# Altium PCB UWB_Tag_V1.PcbDoc
Units mm, origin at the board's own origin, x right, y up, seen from the top; angles counter-clockwise.
Board outline 88.65 x 72.77 mm, 2 copper layers (Top Layer, Bottom Layer); 71 components, 54 nets, 304 pads, 117 vias.
Unrouted connection lines stored in the file: 1.
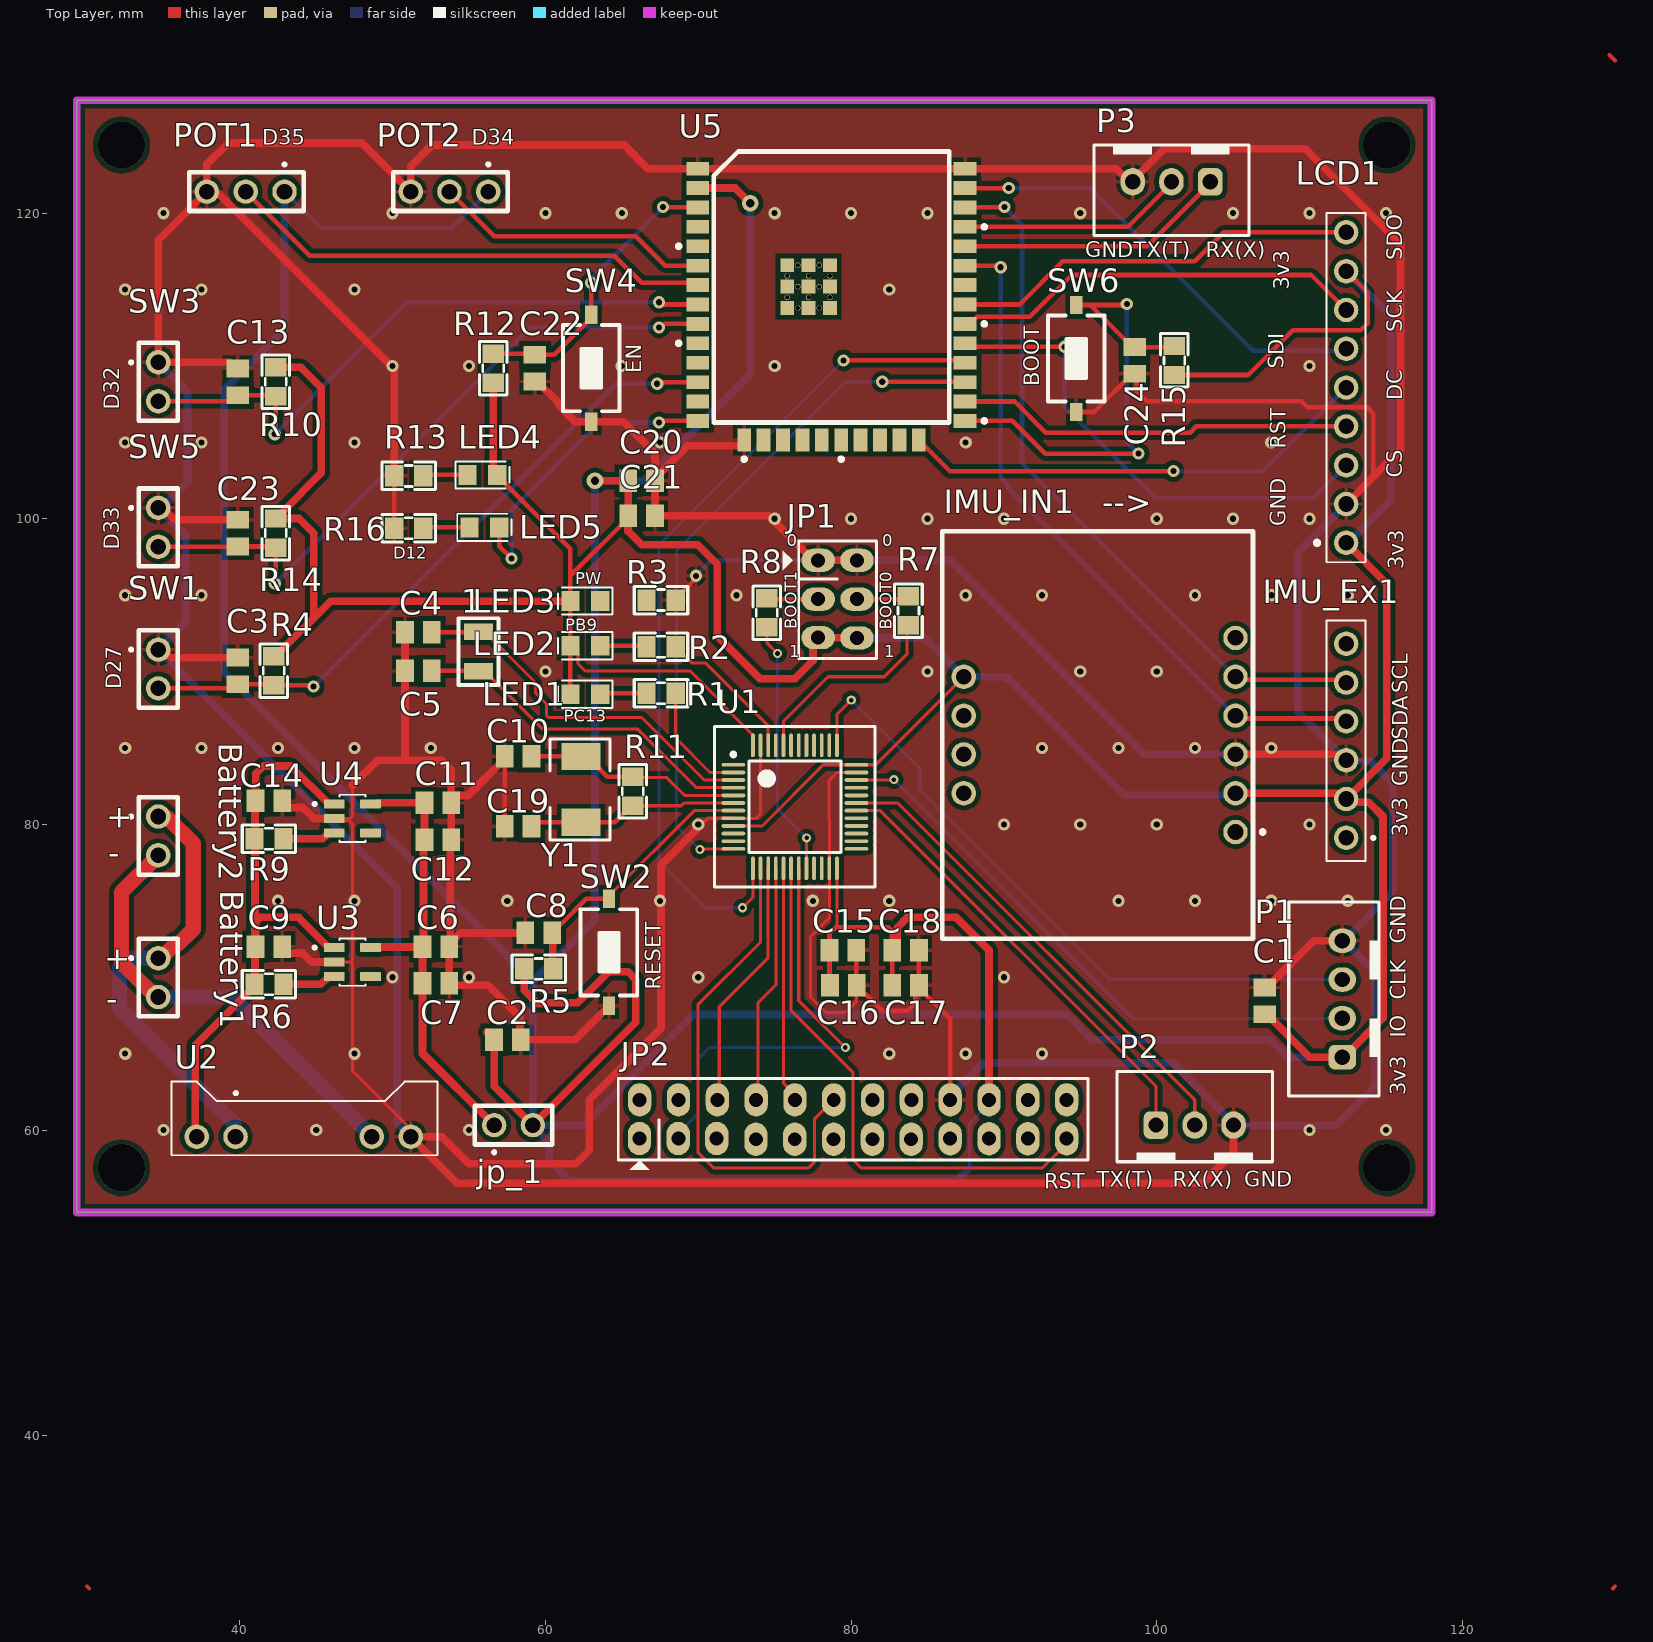
[diagram p0: Top Layer view]
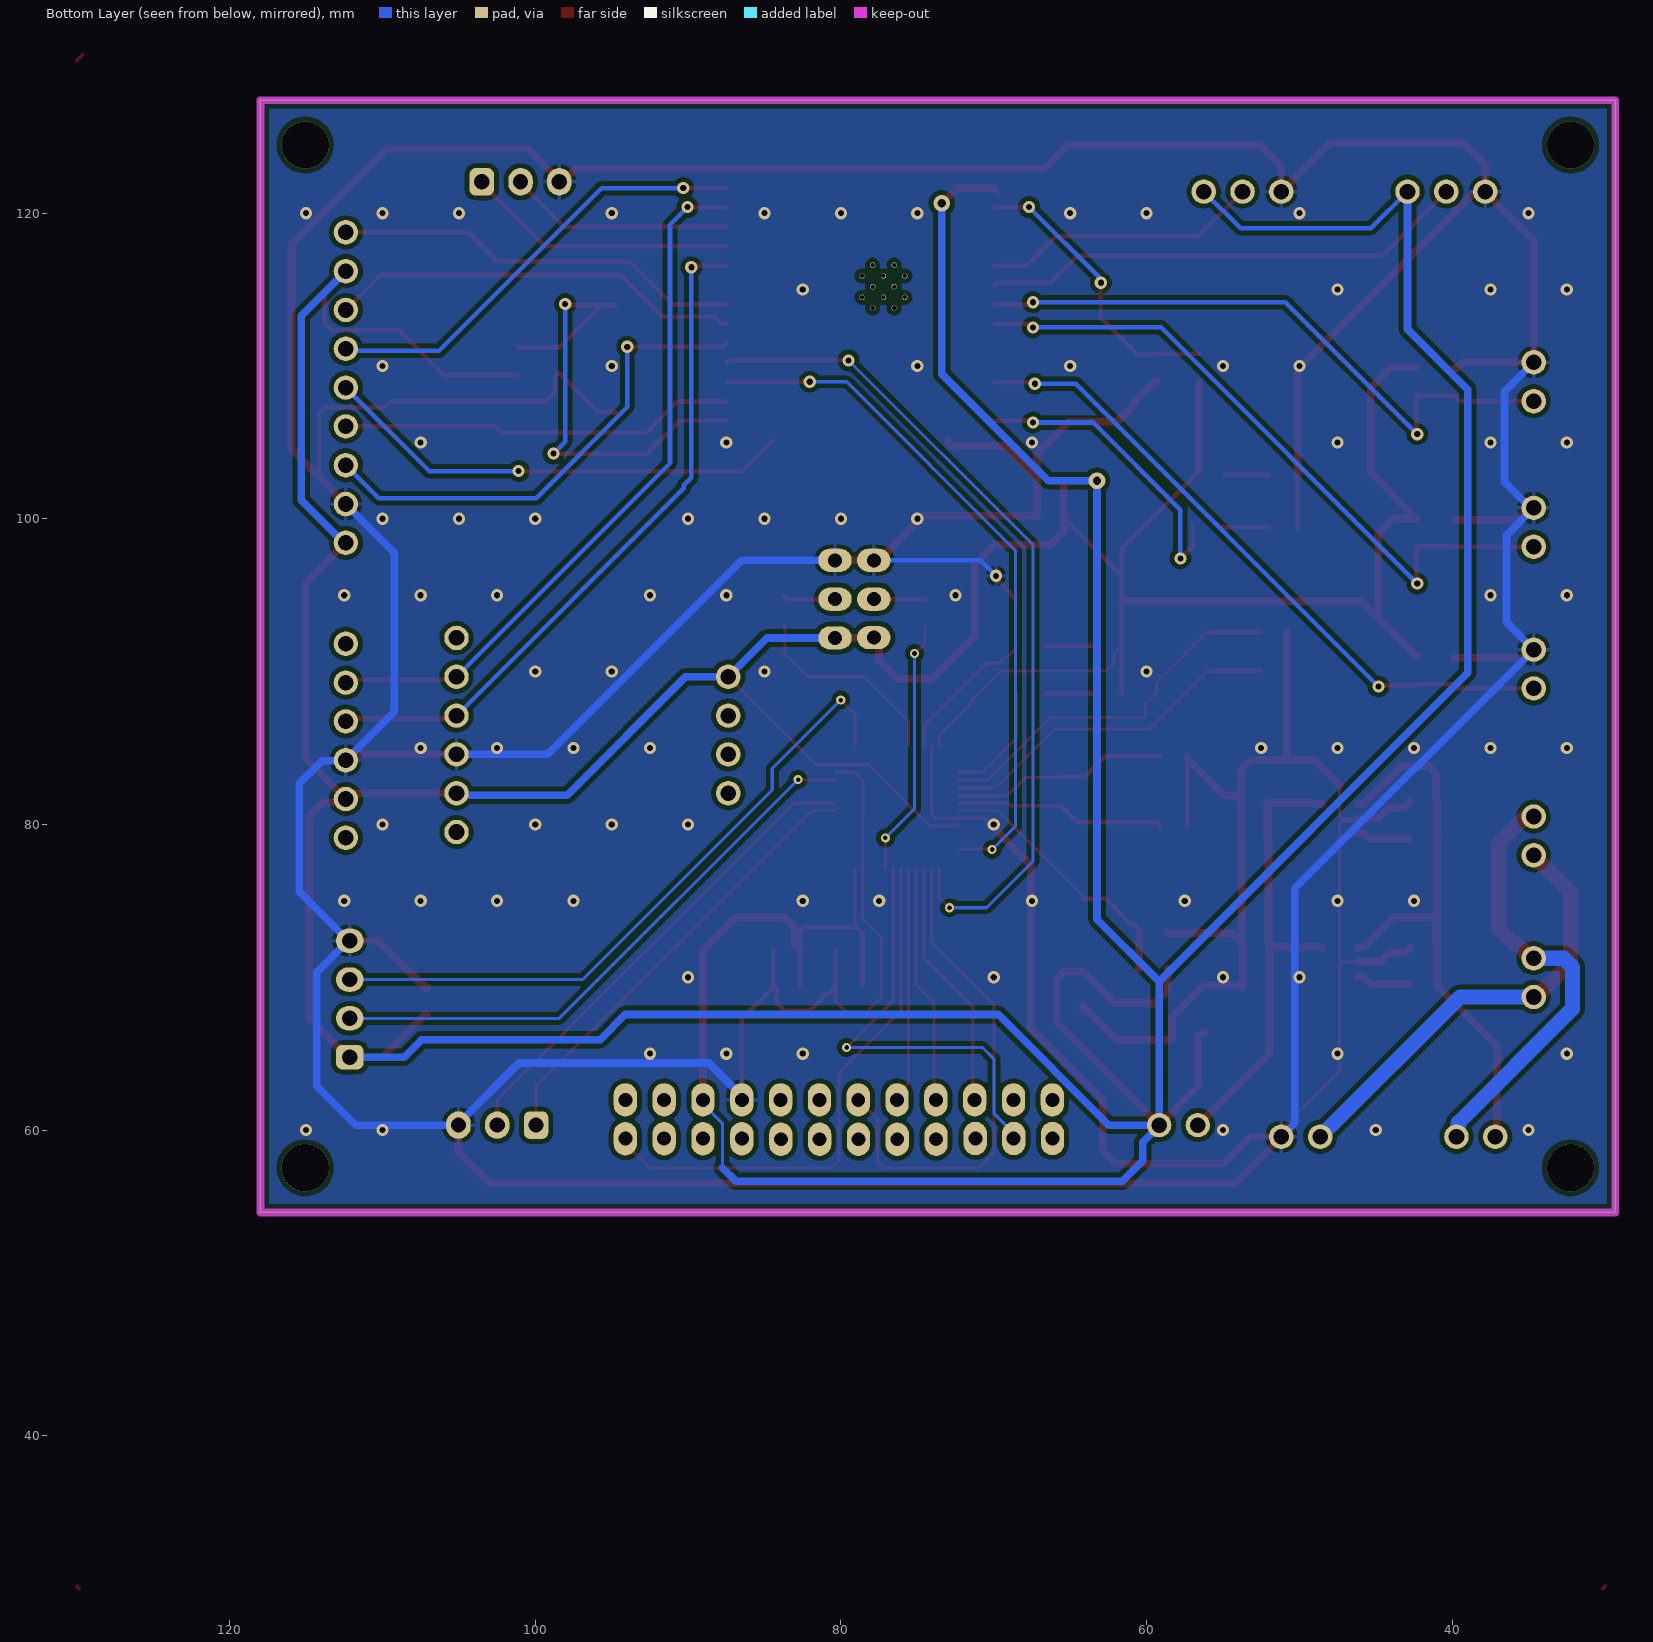
[diagram p1: Bottom Layer view, seen from below]

## Layer stack, top to bottom
Top Solder: solder mask 0.0102, Solder Resist, Dk 3.5
Top Layer: signal copper 0.0356
Dielectric 1: dielectric 0.32, FR-4, Dk 4.8
Bottom Layer: signal copper 0.0356
Bottom Solder: solder mask 0.0102, Solder Resist, Dk 3.5

## Board outline
29.337,54.61 29.337,127.381 117.983,127.381 117.983,54.61

## Design rules (kind name [scope] priority, off if disabled: settings)
Clearance [All] p1: gap=0.2 ignorepadtopadclearanceinfootprint=FALSE
PolygonConnect [All] p1: connectstyle=Relief reliefconductorwidth=0.254 reliefentries=4 polygonreliefangle="90 Angle" airgapwidth=0.254
RoutingVias [All] p1: holewidth=0.711 width=1.27 viastyle="Through Hole" minholewidth=0.711 minwidth=1.27 maxholewidth=0.711 maxwidth=1.27
SolderMaskExpansion [All] p1: expansion=0.102 istentingtop=FALSE
Width RON [InNetClass('RON')] p1: maxlimit=0.5 minlimit=0.2 preferedwidth=0.3
Width POW [InNetClass('POW')] p2: maxlimit=1 minlimit=0.3 preferedwidth=0.5
30 further rules are at their usual default settings.

## Classes and differential pairs
net class RON: 3V3 BOOT BOOT0 BOOT1 D2/SPI_DC D4/SPI_RST D5/SPI_CS D12/LED1 D18/SPI_SCK D19/SPI_SDO D23/SPI_SDI D27 D32 D33 D34_Pot1 D35_Pot2 DB_RX DB_TX DW_IRQ DW_NSS DW_RESET EN GND MISO MOSI NetJP1_2 NetJP1_5 NetLED1_2 NetLED2_2 NetLED3_2 NetLED4_2 NetLED5_2 NetR6_2 NetR9_2 O_3V3 OSCIN OSCOUT PB9 PC13 PC14 PC15 RESET RX0 SCK SCL SDA STMRX_ESPTX STMTX-ESPRX SWCLK SWIO TX0 VOUT
net class POW: VBAT+ VBAT-

## Components (designator, comment, footprint, x,y, rotation, side; value= is the part's Value field where it differs from the comment)
1 "ABS07" ABS07 55.626,91.313 r90 top
Battery1 "JP_1x2" JP_1x2 34.671,69.977 r270 top
Battery2 "JP_1x2" JP_1x2 34.671,79.248 r270 top
C1 "10uF" Capacitor_0805 107.061,68.453 r270 top
C2 "0.1uF" Capacitor_0805 57.517,65.913 r0 top
C3 "10uF" Capacitor_0805 39.878,90.043 r90 top
C4 "20pF" Capacitor_0805 51.689,92.583 r0 top
C5 "20pF" Capacitor_0805 51.689,90.043 r0 top
C6 "47uF" Capacitor_0805 52.832,72.009 r0 top
C7 "0.1uF" Capacitor_0805 52.832,69.596 r0 top
C8 "0.1uF" Capacitor_0805 59.563,72.898 r180 top
C9 "0.1uF" Capacitor_0805 41.91,72.009 r0 top
C10 "20pF" Capacitor_0805 58.215,84.455 r0 top
C11 "47uF" Capacitor_0805 52.959,81.407 r0 top
C12 "0.1uF" Capacitor_0805 52.959,78.994 r0 top
C13 "10uF" Capacitor_0805 39.878,108.966 r90 top
C14 "0.1uF" Capacitor_0805 41.91,81.534 r0 top
C15 "0.1uF" Capacitor_0805 79.465,71.755 r0 top
C16 "0.1uF" Capacitor_0805 79.502,69.469 r0 top
C17 "0.1uF" Capacitor_0805 83.566,69.469 r0 top
C18 "0.1uF" Capacitor_0805 83.566,71.755 r0 top
C19 "20pF" Capacitor_0805 58.215,79.883 r0 top
C20 "10uF" Capacitor_0805 66.294,102.489 r0 top
C21 "0.1uF" Capacitor_0805 66.294,100.203 r0 top
C22 "10uF" Capacitor_0805 59.309,109.855 r270 top
C23 "10uF" Capacitor_0805 39.878,99.06 r90 top
C24 "10uF" Capacitor_0805 98.552,110.363 r270 top
IMU_Ex1 "BNO055" BNO055_External 112.395,85.471 r90 top
IMU_IN1 "BNO055" BNO055_Internal 96.266,85.852 r90 top
JP1 "Connector 3x2" JP3x2 79.121,94.742 r270 top
JP2 "Connector 12x2" JP12X2_1 66.167,59.436 r0 top
jp_1 "SW_POWER" JP_1x2 57.912,60.325 r0 top
LCD1 "ILI9341" ILI9341_LCD3.5 112.395,108.585 r0 top
LED1 "Led" "Led 0805 Blue" 62.611,88.519 r0 top
LED2 "Led" "Led 0805 Blue" 62.611,91.694 r0 top
LED3 "Led" "Led 0805 Blue" 62.611,94.615 r0 top
LED4 "Led" "Led 0805 Blue" 55.88,102.87 r180 top
LED5 "Led" "Led 0805 Blue" 56.007,99.441 r180 top
P1 "SWD" HDR/Header/4/BOX 112.141,68.58 r90 top
P2 "UART" HDR/Header/3/BOX 102.489,60.325 r90 top
P3 "UART" HDR/Header/3/BOX 100.965,122.047 r270 top
POT1 "JP_1x3" JP_1x3 44.323,115.951 r180 top
POT2 "JP_1x3" JP_1x3 57.658,115.951 r180 top
R1 "1k" "tro smd 0805" 67.564,88.646 r0 top
R2 "1k" "tro smd 0805" 67.564,91.694 r0 top
R3 "1k" "tro smd 0805" 67.564,94.742 r0 top
R4 "10k" "tro smd 0805" 42.164,90.043 r90 top
R5 "10k" "tro smd 0805" 59.563,70.485 r180 top
R6 "1k" "tro smd 0805" 41.91,69.596 r0 top
R7 "10k" "tro smd 0805" 83.693,93.98 r90 top
R8 "10k" "tro smd 0805" 74.549,93.853 r270 top
R9 "1k" "tro smd 0805" 41.91,79.121 r0 top
R10 "10k" "tro smd 0805" 42.291,108.966 r90 top
R11 "1M" "tro smd 0805" 65.659,82.169 r90 top
R12 "10k" "tro smd 0805" 56.642,109.855 r270 top
R13 "1k" "tro smd 0805" 51.054,102.743 r180 top
R14 "10k" "tro smd 0805" 42.291,99.06 r90 top
R15 "10k" "tro smd 0805" 101.219,110.363 r270 top
R16 "1k" "tro smd 0805" 51.054,99.314 r180 top
SW1 "JP_1x2" JP_1x2 34.671,90.17 r270 top
SW2 "SW" SW1-SMD 64.156,71.628 r90 top value="SW chip 2 pin"
SW3 "JP_1x2" JP_1x2 34.671,108.966 r270 top
SW4 "SW" SW1-SMD 62.992,109.855 r90 top value="SW chip 2 pin"
SW5 "JP_1x2" JP_1x2 34.671,99.441 r270 top
SW6 "SW" SW1-SMD 94.742,110.49 r90 top value="SW chip 2 pin"
U1 "STM32F103C8T6" LQFP48 76.327,81.153 r270 top
U2 "TP4056_charger" TP4056_charger 44.181,48.063 r90 top
U3 "AP2112K-3.3TRG1" SOT95P285X140-5N 47.371,70.993 r0 top
U4 "AP2112K-3.3TRG1" SOT95P285X140-5N 47.371,80.391 r0 top
U5 "ESP32_WROOM_32U" ESP32_WROOM_32U 78.719,114.032 r0 top
Y1 "8Mhz" "Thach Anh 2 chan SMD5032" 62.335,82.296 r90 top value=4Mhz

## Footprints (in the part's own frame and the unit in brackets; to place one, negate y for a bottom-side part, rotate by r counter-clockwise, add the part's x,y. Pads: shape width x height; smd on the part's side, far side on the other; paste and mask are expansions set on the pad)
ABS07 [mm] "HC-49US XTAL"
  rect 1.1x1.9 smd: 1(-1.29,0) 2(1.29,0)
  silkscreen extent -2.19,-1.3 2.18,1.31, body extent -1.6,-0.75 1.6,0.75, height 0.9
BNO055_External [mm]
  round 1.6 hole 1.02 mask+0.1: 1(-6.35,0) 2(-3.81,0) 3(-1.27,0) 4(1.27,0) 5(3.81,0) 6(6.35,0)
  silkscreen extent -7.87,-1.88 7.87,1.27, body extent -8.75,-2.16 8.75,3.59, height 7.1
BNO055_Internal [mm]
  round 1.6 hole 1.02 mask+0.1: 1(-6.35,-8.89) 2(-3.81,-8.89) 3(-1.27,-8.89) 4(1.27,-8.89) 5(3.81,-8.89) 6(6.35,-8.89) 7(3.81,8.89) 8(1.27,8.89) 9(-1.27,8.89) 10(-3.81,8.89)
  silkscreen extent -13.33,-10.77 13.33,10.29, body extent -13.33,-10.12 13.33,10.29, height 9.15
Capacitor_0805 [mm]
  rect 1.16x1.47 smd: 1(-0.875,0) 2(0.875,0)
  body extent -1,-0.6 1,0.6, height 1.2
ESP32_WROOM_32U [mm]
  rect 1.5x0.9 smd: 1(-8.75,8.88) 2(-8.75,7.61) 3(-8.75,6.34) 4(-8.75,5.07) 5(-8.75,3.8) 6(-8.75,2.53) 7(-8.75,1.26) 8(-8.75,-0.01) 9(-8.75,-1.28) 10(-8.75,-2.55) 11(-8.75,-3.82) 12(-8.75,-5.09) 13(-8.75,-6.36) 14(-8.75,-7.63) 25(8.75,-7.63) 26(8.75,-6.36) 27(8.75,-5.09) 28(8.75,-3.82) 29(8.75,-2.55) 30(8.75,-1.28) 31(8.75,-0.01) 32(8.75,1.26) 33(8.75,2.53) 34(8.75,3.8) 35(8.75,5.07) 36(8.75,6.34) 37(8.75,7.61) 38(8.75,8.88)
  rect 0.9x1.5 smd: 15(-5.715,-8.88) 16(-4.445,-8.88) 17(-3.175,-8.88) 18(-1.905,-8.88) 19(-0.635,-8.88) 20(0.635,-8.88) 21(1.905,-8.88) 22(3.175,-8.88) 23(4.445,-8.88) 24(5.715,-8.88)
  rect 0.9x0.9 smd: 39_1(-2.9,2.56) 39_2(-1.5,2.56) 39_3(-0.1,2.56) 39_4(-2.9,1.16) 39_5(-1.5,1.16) 39_6(-0.1,1.16) 39_7(-2.9,-0.24) 39_8(-1.5,-0.24) 39_9(-0.1,-0.24)
  round 0.35 hole 0.3 mask+0: 40_1(-2.2,2.56) 40_2(-0.8,2.56) 40_3(-2.9,1.86) 40_4(-1.5,1.86) 40_5(-0.1,1.86) 40_6(-2.2,1.16) 40_7(-0.8,1.16) 40_8(-2.9,0.46) 40_9(-1.5,0.46) 40_10(-0.1,0.46) 40_11(-2.2,-0.24) 40_12(-0.8,-0.24)
  silkscreen extent -10.1,-10.23 10.1,10, body extent -9,-9.13 9,10.07, height 3.35
HDR/Header/3/BOX [mm]
  rrect50% 1.8x1.6 hole 1: 1(0,2.54)
  oval 1.8x1.6 hole 1: 2(0,0) 3(0,-2.54)
  silkscreen extent -2.41,-5.08 3.5,5.08, body extent -2.29,-5 3.41,5, height 7
HDR/Header/4/BOX [mm]
  rrect50% 1.6x1.8 hole 1: 1(-3.81,0)
  oval 1.6x1.8 hole 1: 2(-1.27,0) 3(1.27,0) 4(3.81,0)
  silkscreen extent -6.35,-2.41 6.35,3.5, body extent -6.25,-2.3 6.25,3.4, height 7
ILI9341_LCD3.5 [mm]
  round 1.6 hole 1.02 mask+0.1: 1(0,-10.16) 2(0,-7.62) 3(0,-5.08) 4(0,-2.54) 5(0,0) 6(0,2.54) 7(0,5.08) 8(0,7.62) 9(0,10.16)
  silkscreen extent -2.03,-11.43 1.27,11.43, body extent -3.56,-12.5 2.19,12.5, height 7.1
JP3x2 [mil] "Connector 3x2"
  oval 60x86 hole 36: 1(-100,-50) 2(0,-50) 3(99,-50) 4(-100,50) 5(0,50) 6(100,50)
  silkscreen extent -150,-141 153,100, body extent -150,-100 150,100, height 335
JP12X2_1 [mil]
  oval 60x86 hole 36: 1(-0.5,0.5) 2(99.5,0.5) 3(198.5,0.5) 4(299.5,-1.5) 5(399.5,-1.5) 6(499.5,-1.5) 7(599.5,-1.5) 8(699.5,-1.5) 9(800,0) 10(900,0) 11(1000,0) 12(1100,0) 13(0,100) 14(100,100) 15(200,100) 16(300,100) 17(400,100) 18(500,100) 19(600,100) 20(700,100) 21(800,100) 22(900,100) 23(1000,100) 24(1100,100)
  silkscreen extent -55,-80 1155,155, body extent -55,-47 1155,150, height 366
JP_1x2 [mm] "CWF2 (DS1069-1x2)"
  round 1.6 hole 1.02 mask+0.1: 1(-1.27,0) 2(1.27,0)
  silkscreen extent -2.54,-1.88 2.54,1.27, body extent -3.77,-2.2 3.73,3.55, height 7
JP_1x3 [mm] "CWF3 (DS1069-1x3)"
  round 1.6 hole 1.02 mask+0.1: 1(1.397,-5.461) 2(3.937,-5.461) 3(6.477,-5.461)
  silkscreen extent 0.13,-7.34 7.62,-4.19, body extent -1.06,-7.66 8.94,-1.9, height 7.1
"Led 0805 Blue" [mm]
  rect 1.2x1.3 smd: 1(-0.975,0) 2(0.975,0)
  silkscreen extent -1.78,-0.89 1.78,0.89, body extent -1.01,-0.62 1.01,0.63, height 1.1
LQFP48 [mm]
  oval 0.25x1.55 smd: 1(-2.75,-4.025) 2(-2.25,-4.025) 3(-1.75,-4.025) 4(-1.25,-4.025) 5(-0.75,-4.025) 6(-0.25,-4.025) 7(0.25,-4.025) 8(0.75,-4.025) 9(1.25,-4.025) 10(1.75,-4.025) 11(2.25,-4.025) 12(2.75,-4.025) 25(2.75,4.025) 26(2.25,4.025) 27(1.75,4.025) 28(1.25,4.025) 29(0.75,4.025) 30(0.25,4.025) 31(-0.25,4.025) 32(-0.75,4.025) 33(-1.25,4.025) 34(-1.75,4.025) 35(-2.25,4.025) 36(-2.75,4.025)
  oval 1.55x0.25 smd: 13(4.025,-2.75) 14(4.025,-2.25) 15(4.025,-1.75) 16(4.025,-1.25) 17(4.025,-0.75) 18(4.025,-0.25) 19(4.025,0.25) 20(4.025,0.75) 21(4.025,1.25) 22(4.025,1.75) 23(4.025,2.25) 24(4.025,2.75) 37(-4.025,2.75) 38(-4.025,2.25) 39(-4.025,1.75) 40(-4.025,1.25) 41(-4.025,0.75) 42(-4.025,0.25) 43(-4.025,-0.25) 44(-4.025,-0.75) 45(-4.025,-1.25) 46(-4.025,-1.75) 47(-4.025,-2.25) 48(-4.025,-2.75)
  silkscreen extent -5.25,-5.25 5.25,5.25, body extent -4.5,-4.5 4.5,4.5, height 1.5
SOT95P285X140-5N [mm]
  rrect15% 1.35x0.6 smd: 1(-1.185,0.95) 2(-1.185,0) 3(-1.185,-0.95) 4(1.185,-0.95) 5(1.185,0.95)
  silkscreen extent -2.57,-1.55 0.85,1.55, body extent -1.5,-1.4 1.5,1.4, height 1.4
SW1-SMD [mm]
  rect 1.2x0.8 smd: 1(-3.5,0) 2(3.5,0)
  silkscreen extent -2.82,-1.85 2.82,1.85, body extent -3.05,-1.85 3.05,1.85, height 2.5
"Thach Anh 2 chan SMD5032" [mil]
  rect 70x100 smd: 1(-85,0) 2(85,0)
  silkscreen extent -130,-75 130,80, body extent -98,-63 98,63, height 51
TP4056_charger [mm]
  round 1.6 hole 1.02 mask+0.1: 1(11.5,4.46) 2(11.5,-4.46) 3(11.5,7) 4(11.5,-7)
  silkscreen extent 10.29,-8.76 15.11,8.64, body extent -14.19,-8.76 15.11,8.64, height 9.34
"tro smd 0805" [mm]
  rect 1.2x1.4 smd: 1(-0.946,-0.061) 2(0.954,-0.061)
  silkscreen extent -1.75,-0.97 1.75,0.84, body extent -1.56,-0.76 1.44,0.64, height 0.53

## Part data
1: "SMD Quartz Crystal", Created by="Zion Blue", Published="28 April 2014", Publisher="Cynetik Group"
C1 C2 C3 C4 C5 C6 C7 C8 C9 C10 C11 C12 C13 C14 C15 C16 C17 C18 C19 C20 C21 C22 C23 C24: library part Capacitor_0805, "Capacitor; Ceramic; Cap; .220uF; Tol 10%; SMT; Vol-Rtg 50V; X7R; Tape And Reel"
IMU_Ex1: library part BNO055_External
JP1: library part JP3x2
JP2: library part JP12x2
jp_1: library part JP_1x2
LCD1: library part ILI9341_LCD3.5
LED1 LED2 LED3 LED4 LED5: "Typical LED"
P1: library part "Header 4_1", "Header, 4-Pin"
P2 P3: library part "Header 3", "Header, 3-Pin"
R1 R2 R3 R6 R9 R13 R16: library part "Tro 0805 1% 1k", "Dán", Chung_Loai=Dán, Don_Vi=Con, Ma_Hang=MH005468, So_Chan=2, Ten_Linh_Kien="Trở 0805 1% 1k"
R4 R5 R7 R8 R10 R12 R14 R15: library part "Tro 0805 1% 10k", "Dán", Chung_Loai=Dán, Don_Vi=Con, Ma_Hang=MH005473, So_Chan=2, Ten_Linh_Kien="Trở 0805 1% 10k"
R11: library part "Tro 0805 1% 1M", "Dán", Chung_Loai=Dán, Don_Vi=Con, Ma_Hang=MH005469, So_Chan=2, Ten_Linh_Kien="Trở 0805 1% 1M"
SW2 SW4 SW6: library part SW2, "Switch button 2 pin"
U1: "STM32 ARM-based 32-bit MCU with ARM 32-bit Cortex-M3 Microcontroller, 128 Kbytes Flash, 48-pin LQFP, Industrial Temperature", ComponentLink1Description="Manufacturer Link", ComponentLink1URL=www.st.com/stm32, ComponentLink2Description=Datasheet, ComponentLink2URL=http://www.st.com/stonline/products/literature/ds/13586.pdf, DatasheetVersion="rev6, Mar-2008", PackageDescription="48-Pin Low-Profile Quad Flat Pack, 7 x 7 mm Body, 0.5 mm Pitch (LQFP48)", PackageReference=LQFP48, PackageVersion=Mar-2008, Published=30-May-2008, Publisher="Altium Limited"
U3 U4: "Linear Voltage Regulator IC Positive Fixed 1 Output 600mA SOT-25", Package="SOT-753 Diodes Inc.", Availability="In Stock", Check_prices=https://www.snapeda.com/parts/AP2112K-3.3TRG1/Diodes+Inc./view-part/?ref=eda, MF="Diodes Inc.", MP=AP2112K-3.3TRG1, Price=None, Purchase-URL=https://pricing.snapeda.com/search/part/AP2112K-3.3TRG1/?ref=eda, SnapEDA_Link=https://www.snapeda.com/parts/AP2112K-3.3TRG1/Diodes+Inc./view-part/?ref=snap
U5: "Bluetooth, WiFi 802.11b/g/n, Bluetooth v4.2 +EDR, Class 1, 2 and 3 Transceiver Module 2.4GHz ~ 2.5GHz Antenna Not Included, U.FL Surface Mount"
Y1: library part "Thach Anh 2 chan SMD 5032", "Crystal For all Crystal 2pin."

## Via types
v1: diameter 0.8, hole 0.4, Top Layer to Bottom Layer, 104 vias
v2: diameter 0.6, hole 0.3, Top Layer to Bottom Layer, 7 vias
v3: diameter 3.1, hole 3.1, Top Layer to Bottom Layer, 4 vias
v4: diameter 1.1, hole 0.55, Top Layer to Bottom Layer, 2 vias

## Nets (pads, with @x,y where several pads share a name; then routed paths per layer and width w, separated by ;. In a path a pad name is that pad's centre, name@x,y a point inside that pad or via, vN(x,y) a via of type N, cw(c..) or ccw(c..) an arc to the next point about the centre after c; other vN are vias at no path point)
3V3: C1.2 C2.1 C15.1 C16.1 C17.1 C18.1 C20.1 C21.1 IMU_Ex1.2 IMU_IN1.2 IMU_IN1.7 JP1.3 JP1.6 JP2.22 jp_1.2 LCD1.1 LCD1.8 LED1.1 LED2.1 LED3.1 LED4.1 P1.1 POT1.1 POT2.1 R4.2 R5.2 R10.2 R12.2 R14.2 R15.2 U1.9 U1.24 U1.36 U1.48 U5.2 | length 559.8
  Top Layer w0.2: LED2.1 62.136,91.194 62.136,90.518 62.611,90.043 69.469,90.043 71.518,87.994 71.518,87.887 73.577,85.828 U1.48 ; U1.9 74.188,79.903 78.188,83.903 U1.36 81.617,83.903 IMU_IN1.7 ; 78.994,73.279 79.077,73.362 U1.24 ; JP2.22@89.027,61.722 JP2.22
  Top Layer w0.3: LED4.1@56.581,103.144 LED4.1 56.855,102.82 61.636,98.039 61.636,96.265 ; LED1.1 LED2.1 LED3.1 61.636,96.265 ; C21.1@65.405,100.189 65.405,100.034 61.636,96.265 ; U5.2@69.739,121.412 U5.2 ; C16.1 78.59,69.506 C15.1 78.59,72.875 78.994,73.279 82.423,73.279 82.677,73.025 82.677,71.769 C18.1 C17.1 ; R15.2 105.98,109.409 108.902,112.331 113.347,112.331 113.792,112.776 113.792,114.808 LCD1.8
  Top Layer w0.5: R4.2 42.325,90.997 45.942,94.615 LED3.1 ; R14.2 R14.2@42.452,100.014 ; R10.2 44.004,109.92 45.339,108.585 45.339,103.002 42.802,100.464 42.802,100.364 R14.2@42.452,100.014 ; 44.831,93.604 44.831,99.06 43.877,100.014 R14.2@42.452,100.014 ; C2.1@56.157,66.398 56.312,66.398 56.642,66.068 C2.1 56.642,62.865 jp_1.2 ; LED4.1@56.581,103.144 R12.2 ; R5.2@58.5,70.438 R5.2 58.609,69.153 59.483,68.279 59.897,68.279 59.944,68.326 62.103,68.326 64.135,70.358 65.405,70.358 65.913,69.85 65.913,67.056 jp_1.2 ; jp_1.2@59.182,60.248 jp_1.2 ; v4@63.627,102.489 C20.1 C21.1 C21.1@65.405,100.189 ; C21.1@65.405,100.034 65.405,99.187 66.294,98.298 69.977,98.298 71.247,97.028 71.247,92.329 74.041,89.535 76.327,89.535 77.507,90.715 77.507,91.884 JP1.3 77.864,92.215 80.378,92.215 JP1.6 ; U5.2 72.414,121.642 v4(73.406,120.65) ; C18.1@82.677,71.769 83.019,72.111 83.019,73.24 83.693,73.914 86.868,73.914 89.027,71.755 JP2.22 ; IMU_IN1.2 111.716,82.042 112.097,81.661 IMU_Ex1.2 ; C1.2 107.216,67.578 110.024,64.77 P1.1 112.241,64.77 114.808,67.337 114.808,80.518 113.875,81.451 112.605,81.451 IMU_Ex1.2 ; LCD1.1 115.062,95.758 115.062,84.328 IMU_Ex1.2
  Bottom Layer w0.2: 87.757,57.531 87.757,60.452 JP2.22@89.027,61.722
  Bottom Layer w0.3: POT1.1 45.339,118.999 53.848,118.999 POT2.1
  Bottom Layer w0.5: POT1.1 42.926,112.395 38.989,108.458 38.989,89.916 59.182,69.723 ; jp_1.2@59.182,60.248 60.24,59.191 60.24,57.997 61.595,56.642 86.868,56.642 87.757,57.531 ; v4(73.406,120.65) 73.406,109.474 66.421,102.489 v4(63.246,102.489) 63.246,73.787 59.182,69.723 ; JP1.6 84.836,92.202 IMU_IN1.7 90.17,89.662 97.917,81.915 105.029,81.915 IMU_IN1.2 ; P1.1 108.585,64.77 107.442,65.913 95.758,65.913 94.107,67.564 69.711,67.564 62.472,60.325 jp_1.2 59.182,69.723 ; LCD1.1 112.522,98.425 115.316,101.219 115.316,113.284 LCD1.8
BOOT: C24.1 R15.1 SW6.2 U5.25 | length 32.3
  Top Layer w0.3: U5.25 89.257,106.402 89.281,106.426 90.551,106.426 92.71,104.267 v1(98.806,104.267) ; SW6.2 95.645,113.99 ; v1(98.044,114.046) 97.988,113.99 95.645,113.99 ; R15.1 101.088,111.238 C24.1 98.397,111.238 95.645,113.99
  Bottom Layer w0.3: v1(98.044,114.046) 98.044,105.029 v1(98.806,104.267)
BOOT0: R7.1 U1.44 | length 13.4
  Top Layer w0.2: U1.44 75.577,86.753 78.486,89.662 82.179,89.662 83.654,91.137 83.654,92.934 R7.1
BOOT1: R8.2 U1.20 | length 16.9
  Top Layer w0.2: R8.2 74.488,91.882 v2(75.184,91.186) ; U1.20 77.077,79.109 v2(77.089,79.121)
  Bottom Layer w0.2: v2(75.184,91.186) 75.184,81.026 v2(77.089,79.121)
D2/SPI_DC: LCD1.5 U5.24 | length 31.1
  Top Layer w0.3: U5.24 86.462,103.124 v1(101.092,103.124)
  Bottom Layer w0.3: v1(101.092,103.124) 106.934,103.124 LCD1.5
D4/SPI_RST: LCD1.4 U5.26 | length 25.9
  Top Layer w0.3: U5.26 90.702,107.672 92.743,105.631 102.186,105.631 102.6,106.045 LCD1.4
D5/SPI_CS: LCD1.3 U5.29 | length 32.3
  Top Layer w0.3: U5.29 87.699,111.252 v1(93.98,111.252)
  Bottom Layer w0.3: v1(93.98,111.252) 93.98,107.315 99.949,101.346 110.236,101.346 LCD1.3
D12/LED1: LED5.1 U5.14 | length 20.1
  Top Layer w0.3: LED5.1 56.982,98.212 v1(57.785,97.409) ; v1(67.437,106.299) 67.54,106.402 U5.14
  Bottom Layer w0.3: v1(57.785,97.409) 57.785,100.584 63.5,106.299 v1(67.437,106.299)
D18/SPI_SCK: LCD1.7 U5.30 | length 27.2
  Top Layer w0.3: U5.30 87.769,112.752 88.239,113.222 91.704,113.222 94.433,115.951 110.109,115.951 LCD1.7
D19/SPI_SDO: LCD1.9 U5.31 | length 26.9
  Top Layer w0.3: U5.31 91.035,114.022 93.853,116.84 102.489,116.84 104.394,118.745 LCD1.9
D23/SPI_SDI: LCD1.6 U5.37 | length 29.5
  Top Layer w0.3: U5.37 v1(90.321,121.642) v1@90.424,121.539
  Bottom Layer w0.3: v1(90.321,121.642) 95.655,121.642 106.299,110.998 112.268,110.998 LCD1.6
D27: C3.1 R4.1 SW1.2 U5.12 | length 43.7
  Top Layer w0.2: R4.1@42.154,89.168 R4.1
  Top Layer w0.3: SW1.2 39.61,88.9 C3.1 R4.1@42.154,89.168 ; R4.1 44.761,89.097 v1(44.831,89.027) ; v1(67.31,108.839) 67.413,108.942 U5.12
  Bottom Layer w0.3: v1(44.831,89.027) 64.643,108.839 v1(67.31,108.839)
D32: C13.1 R10.1 SW3.2 U5.8 | length 41.7
  Top Layer w0.3: SW3.2 39.483,107.696 C13.1 42.281,108.091 R10.1 42.352,105.598 v1(42.291,105.537) ; v1(67.437,114.173) 67.588,114.022 U5.8
  Bottom Layer w0.3: v1(42.291,105.537) 50.927,114.173 v1(67.437,114.173)
D33: C23.1 R14.1 SW5.2 U5.9 | length 44.5
  Top Layer w0.3: SW5.2 39.864,98.171 C23.1 42.281,98.185 R14.1 42.352,95.819 v1(42.291,95.758) ; v1@67.691,112.649 67.794,112.752 U5.9
  Bottom Layer w0.3: v1(42.291,95.758) 59.055,112.522 v1(67.437,112.522)
D34_Pot1: POT2.2 U5.6 | length 18.3
  Top Layer w0.3: POT2.2 56.642,118.491 65.913,118.491 67.842,116.562 U5.6
D35_Pot2: POT1.2 U5.7 | length 32.1
  Top Layer w0.3: POT1.2 44.577,117.221 64.516,117.221 66.294,115.443 69.818,115.443 U5.7
DB_RX: P2.2 U1.31 | length 31.8
  Top Layer w0.2: U1.31 83.062,81.403 102.489,61.976 P2.2
DB_TX: P2.1 U1.30 | length 29.6
  Top Layer w0.2: U1.30 81.911,80.903 99.949,62.865 P2.1
DW_IRQ: JP2.2 U1.19 | length 28.7
  Top Layer w0.2: U1.19 76.577,68.457 v2(79.629,65.405)
  Bottom Layer w0.2: JP2.2 68.694,59.779 69.977,61.062 69.977,64.643 70.739,65.405 v2(79.629,65.405)
DW_NSS: JP2.18 U1.14 | length 33.1
  Top Layer w0.2: U1.14 74.077,72.299 69.977,68.199 69.977,58.547 70.993,57.531 77.226,57.531 77.597,57.902 77.597,60.706 JP2.18
DW_RESET: JP2.12 U1.18 | length 35.9
  Top Layer w0.2: U1.18 76.077,67.814 80.137,63.754 80.137,58.029 80.254,57.912 80.264,57.912 80.645,57.531 92.532,57.531 94.107,59.106 JP2.12
EN: C22.1 R12.1 SW4.2 U5.3 | length 18.9
  Top Layer w0.3: R12.1 59.238,110.801 C22.1 60.567,110.73 62.992,113.155 SW4.2 v1(62.992,115.443) ; v1(67.691,120.396) 69.945,120.396 U5.3
  Bottom Layer w0.3: v1(62.992,115.443) 63.088,115.539 63.088,115.793 v1(67.691,120.396)
GND: C1.1 C2.2 C3.2 C4.1 C5.1 C6.2 C7.2 C8.2 C9.2 C10.1 C11.2 C12.2 C13.2 C14.2 C15.2 C16.2 C17.2 C18.2 C19.1 C20.2 C21.2 C22.2 C23.2 C24.2 IMU_Ex1.3 IMU_IN1.3 JP1.1 JP1.4 JP2.21 LCD1.2 P1.4 P2.3 P3.3 POT1.3 POT2.3 R3.2 R13.2 R16.2 SW1.1 SW2.1 SW3.1 SW4.1 SW5.1 SW6.1 U1.8 U1.23 U1.35 U1.47 U2.4 U3.2 U4.2 U5.1 U5.15 U5.38 | length 654.8
  Top Layer w0.2: U3.2 47.244,70.993 ; 47.371,82.55 47.371,80.518 47.244,80.391 U4.2 46.357,80.22 47.161,80.22 47.371,80.01 47.371,71.12 47.244,70.993 ; U2.4 50.913,59.831 50.913,60.339 47.371,63.881 47.371,70.876 47.254,70.993 47.244,70.993 ; 69.85,79.629 70.624,80.403 U1.8 72.309,80.396 73.377,80.396 73.382,80.391 73.787,80.391 74.077,80.681 U1.47 ; C16.2@80.34,69.506 80.34,68.402 79.629,67.691 78.359,67.691 77.343,68.707 77.343,72.644 78.577,73.878 U1.23 78.577,80.34 78.569,80.348 78.569,82.887 79.085,83.403 U1.35
  Top Layer w0.3: R16.2 R13.2 ; C19.1 C10.1@57.34,84.3 ; R3.2 68.968,95.131 68.968,95.231 69.754,96.017 69.754,96.17 v1(69.85,96.266) ; C15.2 80.34,69.506 C16.2 80.377,69.314 80.807,68.884 80.962,68.884 82.028,67.818 83.693,67.818 84.201,68.326 84.201,69.229 C17.2 ; C18.2 C17.2 ; JP2.21 86.487,67.268 84.441,69.314 C17.2 ; SW6.1 95.899,106.99 98.397,109.488 C24.2 98.707,109.333 98.707,108.331 99.342,107.696 109.474,107.696 109.879,107.291 113.768,107.291 114.173,106.885 114.173,102.743
  Top Layer w0.5: SW1.1 34.969,91.44 35.491,90.918 C3.2 ; SW5.1 34.969,100.711 35.745,99.935 C23.2 ; C13.2 39.723,109.841 39.328,110.236 SW3.1 34.671,118.237 POT1.3 ; C9.2 42.785,71.912 43.115,71.582 44.115,71.582 44.704,70.993 U3.2 ; C14.2 42.785,81.437 43.115,81.107 44.115,81.107 44.831,80.391 U4.2 ; 47.371,82.55 49.022,84.201 50.8,84.201 ; R13.2 50.1,109.793 38.691,121.202 38.056,121.202 POT1.3 ; C4.1 C5.1 50.814,84.215 50.8,84.201 ; C7.2@53.707,69.314 53.862,69.469 56.261,69.469 58.332,67.398 58.332,65.973 C2.2 61.941,65.913 63.806,67.778 64.006,67.778 64.156,67.928 SW2.1 ; C7.2@53.707,69.469 C7.2 C6.2 53.707,72.164 C6.2@53.77,72.227 ; C10.1 57.34,84.3 54.932,81.892 54.164,81.892 C11.2@53.834,81.562 ; C8.2 54.441,72.898 C6.2@53.77,72.227 ; C22.2 59.464,108.98 60.864,107.58 60.864,107.425 61.934,106.355 SW4.1 65.095,106.355 67.169,104.281 C20.2@67.169,102.644 ; 69.85,79.629 67.564,77.343 67.564,66.675 62.865,61.976 62.865,58.674 61.976,57.785 54.991,57.785 53.213,59.563 U2.4 54.229,56.515 102.997,56.515 105.029,58.547 P2.3 ; U5.15 73.004,104.975 72.804,104.775 69.3,104.775 C20.2@67.169,102.644 ; JP1.4 JP1.1 77.521,97.282 74.6,100.203 C21.2 C20.2 C20.2@67.169,102.644 ; IMU_IN1.3 111.716,84.582 112.097,84.201 IMU_Ex1.3 ; C1.1 107.216,69.328 110.278,72.39 P1.4 ; LCD1.2 114.173,102.743 115.951,104.521 115.951,117.983 109.728,124.206 100.484,124.206 98.425,122.147 P3.3 98.227,122.047 97.362,122.912 U5.38 U5.1 66.699,122.912 65.151,124.46 52.578,124.46 51.181,123.063 POT2.3 48.006,124.587 39.243,124.587 37.846,123.19 POT1.3 ; 50.8,84.201 53.213,84.201 53.834,83.58 C11.2@53.834,81.562 ; C6.2@53.77,72.227 53.77,78.93 C12.2 C11.2 C11.2@53.834,81.562
  Bottom Layer w0.3: v1(69.85,96.266) 70.866,97.282 JP1.1
  Bottom Layer w0.5: SW3.1 36.576,108.331 36.576,102.401 34.886,100.711 SW5.1 36.449,98.933 36.449,93.218 SW1.1 50.292,75.819 50.292,60.452 U2.4 ; JP1.4 86.487,97.282 99.187,84.582 IMU_IN1.3 ; JP2.21 86.487,62.23 88.646,64.389 101.065,64.389 105.029,60.425 P2.3 111.76,60.325 114.3,62.865 114.3,70.331 P1.4@112.241,72.39 ; P1.4 P1.4@112.241,72.39 ; LCD1.2 109.22,97.79 109.22,87.376 IMU_Ex1.3 112.421,84.175 113.945,84.175 115.443,82.677 115.443,75.592 P1.4@112.241,72.39
  other v1: 35,60 45,60 55,60 110,60 115,60 32.5,65 47.5,65 82.5,65 87.5,65 92.5,65 50,70 55,70 70,70 90,70 42.5,75 47.5,75 57.5,75 67.5,75 77.5,75 82.5,75 97.5,75 102.5,75 107.5,75 112.5,75 70,80 90,80 95,80 100,80 110,80 32.5,85 37.5,85 42.5,85 47.5,85 52.5,85 92.5,85 97.5,85 102.5,85 107.5,85 60,90 85,90 95,90 100,90 32.5,95 37.5,95 72.5,95 87.5,95 92.5,95 102.5,95 107.5,95 112.5,95 75,100 80,100 85,100 90,100 100,100 105,100 110,100 32.5,105 37.5,105 47.5,105 67.5,105 87.5,105 107.5,105 50,110 55,110 65,110 75,110 95,110 110,110 32.5,115 37.5,115 47.5,115 82.5,115 35,120 50,120 60,120 65,120 75,120 80,120 85,120 95,120 105,120 110,120 115,120
MISO: JP2.16 U1.16 | length 16
  Top Layer w0.2: JP2.16@73.787,62.306 JP2.16 73.914,62.103 73.914,68.326 75.077,69.489 U1.16
MOSI: JP2.17 U1.17 | length 15.5
  Top Layer w0.2: U1.17 75.577,63.058 76.327,62.308 JP2.17
NetJP1_2: JP1.2 R8.1 | length 3.4
  Top Layer w0.3: R8.1 74.545,94.742 JP1.2
NetJP1_5: JP1.5 R7.2 | length 3.4
  Top Layer w0.3: JP1.5 83.561,94.742 R7.2
NetLED1_2: LED1.2 R1.1 | length 3.1
  Top Layer w0.3: LED1.2 63.652,88.585 R1.1
NetLED2_2: LED2.2 R2.1 | length 3.1
  Top Layer w0.3: LED2.2 66.558,91.694 R2.1
NetLED3_2: LED3.2 R3.1
NetLED4_2: LED4.2 R13.1 | length 2.9
  Top Layer w0.3: R13.1 52.066,102.87 LED4.2
NetLED5_2: LED5.2 R16.1 | length 3.1
  Top Layer w0.3: R16.1 52.066,99.441 LED5.2
NetR6_2: R6.2 U3.3 | length 3.5
  Top Layer w0.5: R6.2 45.303,69.535 45.811,70.043 U3.3
NetR9_2: R9.2 U4.3 | length 3.5
  Top Layer w0.5: R9.2 45.43,79.06 45.811,79.441 U4.3
O_3V3: C6.1 C7.1 C11.1 C12.1 jp_1.1 U3.5 U4.5 | length 30
  Top Layer w0.5: U3.5 48.589,71.976 51.924,71.976 C6.1 52.021,72.072 52.021,78.93 C12.1 C11.1 48.997,81.407 48.931,81.341 U4.5 ; C6.1@51.957,71.976 51.957,69.469 51.957,66.802 51.957,65.01 jp_1.1
OSCIN: C10.2 R11.2 U1.5 Y1.2 | length 14.3
  Top Layer w0.2: R11.2 65.785,83.058 67.945,83.058 69.1,81.903 U1.5
  Top Layer w0.3: C10.2 Y1.2 62.716,84.455 64.047,83.123 R11.2
OSCOUT: C19.2 R11.1 U1.6 Y1.1 | length 13.8
  Top Layer w0.2: R11.1 68.889,81.223 69.069,81.403 U1.6
  Top Layer w0.3: C19.2 59.344,80.137 Y1.1 64.533,80.137 65.62,81.223 R11.1
PB9: R2.2 U1.46 | length 9.5
  Top Layer w0.2: R2.2 68.518,91.533 69.018,91.033 69.118,91.033 69.601,90.551 70.485,90.551 74.577,86.459 U1.46
PC13: R1.2 U1.2 | length 7.6
  Top Layer w0.2: R1.2 68.518,85.66 70.775,83.403 U1.2
PC14: 1.2 C4.2 U1.3 | length 24.6
  Top Layer w0.2: 1.2 56.026,92.603 59.348,89.281 59.348,88.607 60.071,87.884 60.071,87.112 60.188,86.995 66.294,86.995 70.386,82.903 U1.3
  Top Layer w0.3: C4.2 55.606,92.583 1.2
PC15: 1.1 C5.2 U1.4 | length 22.9
  Top Layer w0.2: 1.1 56.026,90.023 59.816,86.233 66.04,86.233 69.85,82.423 U1.4@72.282,82.423
  Top Layer w0.3: C5.2 55.606,90.043 1.1
RESET: C8.1 R5.1 SW2.2 U1.7 | length 17.8
  Top Layer w0.2: SW2.2 64.156,75.328 69.731,80.903 U1.7
  Top Layer w0.3: C8.1 60.438,73.053 60.868,73.483 61.023,73.483 62.668,75.128 SW2.2
  Top Layer w0.5: C8.1 60.473,72.863 60.473,70.581 R5.1
RX0: P3.1 U5.34 | length 17.8
  Top Layer w0.3: U5.34 99.39,117.832 103.505,121.947 P3.1
SCK: JP2.15 U1.15 | length 16.5
  Top Layer w0.2: JP2.15 71.374,62.103 71.374,68.072 74.577,71.275 U1.15
SCL: IMU_Ex1.5 IMU_IN1.5 U5.36 | length 47
  Top Layer w0.3: U5.36 87.493,120.396 v1(90.043,120.396) ; IMU_IN1.5 105.346,89.471 112.204,89.471 IMU_Ex1.5
  Bottom Layer w0.3: v1(90.043,120.396) 91.186,119.253 91.186,103.632 IMU_IN1.5
SDA: IMU_Ex1.4 IMU_IN1.4 U5.33 | length 45.5
  Top Layer w0.3: U5.33 89.686,116.562 v1(89.789,116.459) ; IMU_IN1.4 105.346,86.931 112.204,86.931 IMU_Ex1.4
  Bottom Layer w0.3: v1(89.789,116.459) 89.789,102.688 90.289,102.188 90.289,101.989 IMU_IN1.4
STMRX_ESPTX: U1.13 U5.28 | length 55.4
  Top Layer w0.2: v2(72.898,74.549) 73.577,75.228 U1.13
  Top Layer w0.3: v1(79.502,110.363) 87.318,110.363 U5.28
  Bottom Layer w0.2: v2(72.898,74.549) 70.475,74.549 67.437,77.587 67.437,98.298 v1(79.502,110.363)
STMTX-ESPRX: U1.12 U5.27 | length 45.9
  Top Layer w0.2: v2(70.104,78.359) 70.138,78.393 72.292,78.393 U1.12
  Top Layer w0.3: v1(82.042,108.966) 87.445,108.966 U5.27
  Bottom Layer w0.2: v2(70.104,78.359) 68.58,79.883 68.58,97.917 79.629,108.966 v1(82.042,108.966)
SWCLK: P1.3 U1.37 | length 43.9
  Top Layer w0.2: U1.37 79.077,87.205 v2(80.01,88.138)
  Bottom Layer w0.2: v2(80.01,88.138) 84.493,83.655 84.493,82.258 96.901,69.85 P1.3
SWIO: P1.2 U1.34 | length 38.3
  Top Layer w0.2: U1.34 v2@82.578,82.903 ; P1.2@111.957,67.126 P1.2
  Bottom Layer w0.2: v2(82.804,82.931) 98.425,67.31 P1.2
TX0: P3.2 U5.35 | length 14.8
  Top Layer w0.3: U5.35 98.12,119.102 100.965,121.947 P3.2
VBAT+: Battery1.1 Battery2.1 U2.1 | length 29
  Top Layer w1: Battery1.1 34.833,71.247 35.777,72.191 35.996,72.191 36.957,73.152 36.957,78.74 35.294,80.403 34.786,80.403 Battery2.1
  Bottom Layer w1: Battery1.1@34.556,71.132 Battery1.1 32.717,71.247 32.131,70.661 32.131,67.945 39.606,60.47 39.606,59.635 U2.1@39.751,59.49
VBAT-: Battery1.2 Battery2.2 U2.2 | length 28.9
  Top Layer w1: Battery1.2 34.509,68.707 32.858,70.358 32.844,70.358 32.258,70.944 32.258,75.565 Battery2.2
  Bottom Layer w1: Battery1.2 39.497,68.707 U2.2@48.445,59.759
VOUT: C9.1 C14.1 R6.1 R9.1 U2.3 U3.1 U4.1 | length 39.6
  Top Layer w0.5: U2.3@37.084,59.51 37.084,65.555 40.964,69.435 R6.1 41,69.571 41,71.974 C9.1 ; U3.1 45.811,71.943 43.84,73.914 41.328,73.914 41.035,73.621 C9.1 ; U4.1 45.811,81.341 43.332,83.82 41.529,83.82 41.035,83.326 C14.1 41,81.499 41,79.096 R9.1 41,79.025 41,73.621 41,72.044 C9.1
pads on no net: IMU_Ex1.1 IMU_Ex1.6 IMU_IN1.1 IMU_IN1.6 IMU_IN1.8 IMU_IN1.9 IMU_IN1.10 JP2.1 JP2.3 JP2.4 JP2.5 JP2.6 JP2.7 JP2.8 JP2.9 JP2.10 JP2.11 JP2.13 JP2.14 JP2.19 JP2.20 JP2.23 JP2.24 U1.1 U1.10 U1.11 U1.21 U1.22 U1.25 U1.26 U1.27 U1.28 U1.29 U1.32 U1.33 U1.38 U1.39 U1.40 U1.41 U1.42 U1.43 U1.45 U3.4 U4.4 U5.4 U5.5 U5.10 U5.11 U5.13 U5.16 U5.17 U5.18 U5.19 U5.20 U5.21 U5.22 U5.23 U5.32 U5.39_1 U5.39_2 U5.39_3 U5.39_4 U5.39_5 U5.39_6 U5.39_7 U5.39_8 U5.39_9 U5.40_1 U5.40_2 U5.40_3 U5.40_4 U5.40_5 U5.40_6 U5.40_7 U5.40_8 U5.40_9 U5.40_10 U5.40_11 U5.40_12
copper on no net: | length 0.9
  Top Layer w0.254: 30,30.149 30.149,30 ; 129.641,130.359 130,130 ; 129.851,30 130,30.149
  other v3: 32.258,57.531 115.062,57.531 32.258,124.46 115.062,124.46

## Polygon pours and split planes (outlines as drawn)
GND on Top Layer "GND_L01_P000" (solid, remove dead copper, pour order 0): 29.337,127.381 29.337,54.61 117.983,54.61 117.983,127.381
GND on Bottom Layer "GND_L02_P001" (solid, remove dead copper, pour order 1): 29.337,127.381 29.337,54.61 117.983,54.61 117.983,127.381

## Keep-outs
Keep-Out Layer:
  the board outline again, w0.5

## Silkscreen, mask and mechanical layers (free items; w line width, h text height)
Top Overlay:
  text "D35" at 41.466,124.483 h1
  text "D34" at 55.182,124.483 h1
  text "GND" at 95.314,117.117 h1
  text "TX(T)" at 98.501,117.117 h1
  text "RX(X)" at 103.2,117.117 h1
  text "SDO" at 116.055,116.904 h1 r90
  text "3v3" at 108.689,114.999 h1 r90
  text "SCK" at 116.055,112.205 h1 r90
  text "SDI" at 108.308,109.832 h1 r90
  text "EN" at 66.271,109.53 h1 r90
  text "BOOT" at 92.306,108.657 h1 r90
  text "DC" at 116.055,107.752 h1 r90
  text "D32" at 32.108,107.125 h1 r90
  text "RST" at 108.435,104.585 h1 r90
  text "CS" at 116.055,102.672 h1 r90
  text "-->" at 96.424,100.326 h1.5
  text "GND" at 108.435,99.505 h1 r90
  text "0" at 75.806,98.194 h0.8
  text "0" at 82.029,98.194 h0.8
  text "D33" at 32.108,97.981 h1 r90
  text "D12" at 50.054,97.382 h0.8
  text "3v3" at 116.182,96.711 h1 r90
  text "PW" at 61.945,95.731 h0.8
  text "BOOT1" at 76.431,92.755 h0.8 r90
  text "BOOT0" at 82.654,92.749 h0.8 r90
  text "PB9" at 61.291,92.683 h0.8
  text "1" at 75.94,90.955 h0.8
  text "1" at 82.163,90.955 h0.8
  text "D27" at 32.235,88.837 h1 r90
  text "SCL" at 116.436,88.583 h1 r90
  text "PC13" at 61.211,86.714 h0.8
  text "SDA" at 116.436,85.535 h1 r90
  text "GND" at 116.436,82.487 h1 r90
  text "+" at 31.25,79.783 h1.5
  text "3v3" at 116.436,79.185 h1 r90
  text "-" at 31.377,77.378 h1.5
  text "GND" at 116.309,72.2 h1 r90
  text "+" at 31.123,70.512 h1.5
  text "RESET" at 67.541,69.168 h1 r90
  text "CLK" at 116.309,68.517 h1 r90
  text "-" at 31.25,67.853 h1.5
  text "IO" at 116.309,66.052 h1 r90
  text "3v3" at 116.309,62.294 h1 r90
  text "TX(T)" at 96.088,56.284 h1
  text "RX(X)" at 101.041,56.284 h1
  text "GND" at 105.728,56.284 h1
  text "RST" at 92.647,56.157 h1

## Text inside footprints (layer, text, board x,y; h text height)
IMU_IN1: Mechanical 2 "Vin" at 103.515,77.785 h1.52 r90
U5: Mechanical 2 "1" at 72.419,121.781 h1.52